# EAGLE board Amplifier_v1.1 (EAGLE 6.5.0)

Size 100 x 80 mm. Coordinates in mm from the lower left corner, seen from the top.
Outline: 0,0 100,0 100,80 0,80 0,0
Copper layers (1*16): Top 0.035mm / dielectric 1.5mm / Bottom 0.035mm
Design rules "default": minimum track width 10mil, minimum drill 24mil, track to track 8mil, track to pad 8mil, pad to pad 8mil, via to via 8mil, smd to smd 8mil, copper to edge 40mil, drill to drill 8mil, minimum pad ring 10mil, minimum via ring 8mil, stop-mask expansion 4mil, vias tented up to drill 0mil, thermal gap 10mil

## Footprints (pad centres in the part's own frame; a part is rotated, then mirrored left to right if it is on the bottom)
SMT_PAD_3MM = smd 3 x 3: PAD 0,0
C025-024X044 = drill 0.813 octagon: 1 -1.27,0; 2 1.27,0
E2,5-6 = drill 0.813 pad 1.6: + -1.27,0 | drill 0.813 pad 1.6 octagon: - 1.27,0
DIL08 = drill 0.813 pad 1.27: 1 -3.81,-3.81; 2 -1.27,-3.81; 3 1.27,-3.81; 4 3.81,-3.81; 5 3.81,3.81; 6 1.27,3.81; 7 -1.27,3.81; 8 -3.81,3.81
DPACK = smd 1.6 x 3: 1 -2.28,-4.8; 3 2.28,-4.8 | smd 5.8 x 6.2: 4 0,2.38
LM337 = smd 1.6 x 3: 1 -2.28,-4.8; 3 2.28,-4.8 | smd 5.8 x 6.2: 4 0,2.38
SMT_PAD_5MM = smd 5 x 5: PAD 0,0
0204V = drill 0.813 octagon: 1 -1.27,0; 2 1.27,0
B25U = drill 0.813 long: A 2.54,-0.889; E -2.54,-0.889; S 0,-0.889
NDN0015A = drill 0.7 pad 1.25: 1 0,0; 2 0.965,2.54; 3 1.93,0; 4 2.895,2.54; 5 3.86,0; 6 4.825,2.54; 7 5.79,0; 8 6.755,2.54; 9 7.72,0; 10 8.685,2.54; 11 9.65,0; 12 11.58,2.54; 13 13.51,0; 14 15.44,2.54; 15 17.37,0
TONE_POT_2GANG = drill 1: 1_1 -6,-3; 1_2 -2,-3; 1_3 2,-3; 2_1 -4,-3; 2_2 0,-3; 2_3 4,-3 | hole 1: 6,-3 | hole 3.3: -7.15,0.3; 7.15,0.3
INDUCTOR = drill 0.7 long: 1 -2.5,0; 2 2.5,0
VOL_POT_2GANG = drill 1.3: 1_1 -5,-2; 1_2 0,-2; 1_3 5,-2; 2_1 -5,3; 2_2 0,3; 2_3 5,3

## Placement (x,y rotation side)
B_R_B  SMT_PAD_3MM  [SMT_PAD_3MM]  -101.6,-72.39 0 top  (outside the outline)
B_R_C  SMT_PAD_3MM  [SMT_PAD_3MM]  -101.6,-77.47 0 top  (outside the outline)
B_R_E  SMT_PAD_3MM  [SMT_PAD_3MM]  -101.6,-67.31 0 top  (outside the outline)
C1  [C025-024X044]  -25.4,93.98 0 top  (outside the outline)
C2  100uF  [E2,5-6]  -91.44,-10.16 0 top  (outside the outline)
C3  [C025-024X044]  -30.48,93.98 0 top  (outside the outline)
C4  [C025-024X044]  -35.56,93.98 0 top  (outside the outline)
C5  [C025-024X044]  -40.64,93.98 0 top  (outside the outline)
C6  [C025-024X044]  -45.72,93.98 0 top  (outside the outline)
C7  [C025-024X044]  -50.8,93.98 0 top  (outside the outline)
C8  [C025-024X044]  -55.88,93.98 0 top  (outside the outline)
C9  [C025-024X044]  -60.96,93.98 0 top  (outside the outline)
C10  [C025-024X044]  -106.68,-402.59 0 top  (outside the outline)
C11  [C025-024X044]  -101.6,-402.59 0 top  (outside the outline)
C12  [C025-024X044]  -96.52,-402.59 0 top  (outside the outline)
C13  [C025-024X044]  -91.44,-402.59 0 top  (outside the outline)
C14  [C025-024X044]  -86.36,-402.59 0 top  (outside the outline)
C15  [C025-024X044]  -81.28,-402.59 0 top  (outside the outline)
C16  100uF  [E2,5-6]  -91.44,-16.51 0 top  (outside the outline)
C17  0.1uF  [C025-024X044]  -92.71,-22.86 0 top  (outside the outline)
C18  0.1uF  [C025-024X044]  -92.71,-27.94 0 top  (outside the outline)
C19  22pF  [C025-024X044]  -92.71,-34.29 0 top  (outside the outline)
C20  22pF  [C025-024X044]  -101.6,-40.64 0 top  (outside the outline)
C21  22pF  [C025-024X044]  -101.6,-57.15 0 top  (outside the outline)
C22  100uF  [E2,5-6]  -100.33,-140.97 0 top  (outside the outline)
C23  100uF  [E2,5-6]  -100.33,-148.59 0 top  (outside the outline)
C24  0.1uF  [C025-024X044]  -101.6,-154.94 0 top  (outside the outline)
C25  0.1uF  [C025-024X044]  -101.6,-161.29 0 top  (outside the outline)
C26  0.1uF  [C025-024X044]  -101.6,-172.72 0 top  (outside the outline)
C27  100uF  [E2,5-6]  -100.33,-180.34 0 top  (outside the outline)
C29  0.1uF  [C025-024X044]  -106.68,-440.69 0 top  (outside the outline)
C31  0.1uF  [C025-024X044]  -106.68,-454.66 0 top  (outside the outline)
C33  0.1uF  [C025-024X044]  -106.68,-476.25 0 top  (outside the outline)
C35  0.1uF  [C025-024X044]  -100.33,-476.25 0 top  (outside the outline)
C37  0.1uF  [C025-024X044]  -106.68,-497.84 0 top  (outside the outline)
C39  0.1uF  [C025-024X044]  -100.33,-497.84 0 top  (outside the outline)
C41  0.1uF  [C025-024X044]  -106.68,-519.43 0 top  (outside the outline)
C43  0.1uF  [C025-024X044]  -100.33,-519.43 0 top  (outside the outline)
C45  0.1uF  [C025-024X044]  -106.68,-541.02 0 top  (outside the outline)
C47  0.1uF  [C025-024X044]  -100.33,-541.02 0 top  (outside the outline)
C49  0.1uF  [C025-024X044]  -106.68,-562.61 0 top  (outside the outline)
C51  0.1uF  [C025-024X044]  -100.33,-562.61 0 top  (outside the outline)
C53  0.1uF  [C025-024X044]  -106.68,-584.2 0 top  (outside the outline)
C55  0.1uF  [C025-024X044]  -100.33,-584.2 0 top  (outside the outline)
IC1  NE5532N  [DIL08]  -101.6,-222.25 0 top  (outside the outline)
IC2  NE5532N  [DIL08]  -101.6,-232.41 0 top  (outside the outline)
IC3  NE5532N  [DIL08]  -101.6,-303.53 0 top  (outside the outline)
IC4  NE5532N  [DIL08]  -101.6,-360.68 0 top  (outside the outline)
IC5  NE5532N  [DIL08]  -88.9,-360.68 0 top  (outside the outline)
IC6  NE5532N  [DIL08]  -76.2,-360.68 0 top  (outside the outline)
IC7  NE5532N  [DIL08]  -101.6,-283.21 0 top  (outside the outline)
IC8  LM317MABDTRK  [DPACK]  -115.57,-580.39 0 top  (outside the outline)
IC9  LM337  [LM337]  -127,-580.39 0 top  (outside the outline)
N_B  SMT_PAD_5MM  [SMT_PAD_5MM]  -100.33,-111.76 0 top  (outside the outline)
N_D  SMT_PAD_5MM  [SMT_PAD_5MM]  -100.33,-124.46 0 top  (outside the outline)
N_S  SMT_PAD_5MM  [SMT_PAD_5MM]  -100.33,-118.11 0 top  (outside the outline)
P_B  SMT_PAD_5MM  [SMT_PAD_5MM]  -100.33,-92.71 0 top  (outside the outline)
P_D  SMT_PAD_5MM  [SMT_PAD_5MM]  -100.33,-99.06 0 top  (outside the outline)
P_S  SMT_PAD_5MM  [SMT_PAD_5MM]  -100.33,-105.41 0 top  (outside the outline)
R1  [0204V]  -44.45,62.23 0 top  (outside the outline)
R2  [0204V]  -54.61,62.23 0 top  (outside the outline)
R3  [0204V]  -104.14,-292.1 0 top  (outside the outline)
R4  [0204V]  -104.14,-297.18 0 top  (outside the outline)
R5  [0204V]  -104.14,-331.47 0 top  (outside the outline)
R6  [0204V]  -85.09,62.23 0 top  (outside the outline)
R7  [0204V]  -17.78,73.66 0 top  (outside the outline)
R8  [0204V]  -27.94,73.66 0 top  (outside the outline)
R9  [0204V]  -38.1,73.66 0 top  (outside the outline)
R10  [0204V]  -48.26,73.66 0 top  (outside the outline)
R11  [0204V]  -58.42,73.66 0 top  (outside the outline)
R12  [0204V]  -68.58,73.66 0 top  (outside the outline)
R13  [0204V]  -78.74,73.66 0 top  (outside the outline)
R14  [0204V]  -88.9,73.66 0 top  (outside the outline)
R15  [0204V]  -17.78,78.74 0 top  (outside the outline)
R16  [0204V]  -93.98,-321.31 0 top  (outside the outline)
R17  [0204V]  -104.14,-326.39 0 top  (outside the outline)
R18  [0204V]  -93.98,-326.39 0 top  (outside the outline)
R19  [0204V]  -86.36,-378.46 0 top  (outside the outline)
R20  [0204V]  -76.2,-378.46 0 top  (outside the outline)
R21  [0204V]  -66.04,-378.46 0 top  (outside the outline)
R22  [0204V]  -104.14,-387.35 0 top  (outside the outline)
R23  [0204V]  -93.98,-387.35 0 top  (outside the outline)
R24  [0204V]  -83.82,-387.35 0 top  (outside the outline)
R25  [0204V]  -73.66,-387.35 0 top  (outside the outline)
R26  [0204V]  -63.5,-387.35 0 top  (outside the outline)
R27  [0204V]  -104.14,-392.43 0 top  (outside the outline)
R28  [0204V]  -93.98,-392.43 0 top  (outside the outline)
R29  [0204V]  -83.82,-392.43 0 top  (outside the outline)
R30  [0204V]  -73.66,-392.43 0 top  (outside the outline)
R31  [0204V]  -63.5,-392.43 0 top  (outside the outline)
R32  [0204V]  -104.14,-397.51 0 top  (outside the outline)
R33  [0204V]  -93.98,-397.51 0 top  (outside the outline)
R34  [0204V]  -48.26,88.9 0 top  (outside the outline)
R35  [0204V]  -58.42,88.9 0 top  (outside the outline)
R36  [0204V]  -83.82,-397.51 0 top  (outside the outline)
R37  [0204V]  -73.66,-397.51 0 top  (outside the outline)
R38  [0204V]  -63.5,-397.51 0 top  (outside the outline)
R43  [B25U]  -100.33,-31.75 0 top  (outside the outline)
R44  1.2k  [0204V]  -99.06,-46.99 0 top  (outside the outline)
R45  500  [0204V]  -99.06,-52.07 0 top  (outside the outline)
R46  12k  [0204V]  -99.06,-63.5 0 top  (outside the outline)
R47  1.2k  [0204V]  -99.06,-82.55 0 top  (outside the outline)
R48  1.2k  [0204V]  -99.06,-87.63 0 top  (outside the outline)
R49  0.1  [0204V]  -99.06,-130.81 0 top  (outside the outline)
R50  0.1  [0204V]  -99.06,-135.89 0 top  (outside the outline)
R51  10  [0204V]  -99.06,-167.64 0 top  (outside the outline)
R52  1.2k  [0204V]  -99.06,-186.69 0 top  (outside the outline)
U8  LME49830  [NDN0015A]  -93.98,-5.08 0 top  (outside the outline)
U$1  TONE_POT_2GANG  [TONE_POT_2GANG]  -99.06,-407.67 0 top  (outside the outline)
U$2  INDUCTOR  [INDUCTOR]  -20.32,54.61 0 top  (outside the outline)
U$3  INDUCTOR  [INDUCTOR]  -34.29,54.61 0 top  (outside the outline)
U$4  INDUCTOR  [INDUCTOR]  -48.26,54.61 0 top  (outside the outline)
U$5  INDUCTOR  [INDUCTOR]  -62.23,54.61 0 top  (outside the outline)
U$6  INDUCTOR  [INDUCTOR]  -76.2,54.61 0 top  (outside the outline)
U$7  INDUCTOR  [INDUCTOR]  -90.17,54.61 0 top  (outside the outline)
U$8  INDUCTOR  [INDUCTOR]  -88.9,-350.52 0 top  (outside the outline)
U$9  INDUCTOR  [INDUCTOR]  -74.93,-350.52 0 top  (outside the outline)
U$10  INDUCTOR  [INDUCTOR]  -104.14,-339.09 0 top  (outside the outline)
U$11  INDUCTOR  [INDUCTOR]  -88.9,-339.09 0 top  (outside the outline)
U$12  INDUCTOR  [INDUCTOR]  -73.66,-339.09 0 top  (outside the outline)
U$13  TONE_POT_2GANG  [TONE_POT_2GANG]  -99.06,-416.56 0 top  (outside the outline)
U$14  TONE_POT_2GANG  [TONE_POT_2GANG]  -99.06,-425.45 0 top  (outside the outline)
U$15  INDUCTOR  [INDUCTOR]  -104.14,-350.52 0 top  (outside the outline)
U$16  VOL_POT_2GANG  [VOL_POT_2GANG]  -96.52,-212.09 0 top  (outside the outline)

## Library data of the parts
B_R_B B_R_C B_R_E IC9 N_B N_D N_S P_B P_D P_S U$1-U$16 = Amplifier_Parts
C1-C27 C29 C31 C33 C35 C37 C39 C41 C43 C45 C47 C49 C51 C53 C55 R1-R38 R44-R52 = rcl
IC1-IC7 = linear
IC8 = v-reg
R43 = pot
U8 = texas

## Nets
GND: C2.+ C3.1 C4.1 C7.2 C8.2 C10.1 C11.1 C14.2 C15.2 C16.- C17.1 C18.2 C22.- C23.+ C24.2 C25.1 C26.1 C27.- C29.1 C31.2 C33.1 C35.2 C37.1 C39.2 C41.1 C43.2 C45.1 C47.2 C49.1 C51.2 C53.1 C55.2 IC1.5 IC2.5 IC3.5 IC4.5 IC5.5 IC6.5 IC7.3 IC7.5 R3.2 R5.1 R7.1 R10.1 R13.1 R15.1 R20.1 R23.1 R26.1 R28.1 R31.2 R38.1 U8.3 U$3.1 U$4.1 U$5.1 U$6.1 U$9.1 U$10.1 U$11.1 U$12.1
N$1: IC7.2 R2.2 U$16.1_1
N$2: C1.1 IC7.1 U$16.1_2 U$16.1_3
N$3: IC7.6 R1.2 U$16.2_1
N$5: C9.1 IC7.7 U$16.2_2 U$16.2_3
N$6: IC1.2 R7.2 R8.1
N$7: C4.2 R4.2 U$2.2
N$9: IC2.2 R12.1 R13.2
N$11: IC1.6 R6.2 R34.1
N$12: C3.2 IC1.3 R3.1 U$2.1
N$13: C5.2 R9.2 U$3.2
N$14: C5.1 IC2.3 R10.2 U$4.2
N$15: IC3.1 R16.1 R17.2
N$17: IC2.1 R11.1 R12.2
N$18: IC2.6 R11.2 R35.1
N$19: IC3.6 R16.2 R18.1
N$21: IC3.7 U$14.1_2 U$14.1_3
N$22: C6.2 C8.1 R14.2 U$5.2
N$23: C7.1 IC3.3 R15.2 U$6.2 U$7.2
N$24: R18.2 U$14.1_1
N$25: C11.2 R32.2 U$8.2
N$27: IC3.2 R5.2 R17.1
N$29: C6.1 U$7.1
N$30: IC4.6 R19.2 R29.1
N$32: C12.2 R22.2 U$9.2
N$33: C12.1 IC5.3 R23.2 U$10.2
N$34: IC5.1 R24.1 R25.2
N$35: IC5.6 R24.2 R30.1
N$37: C13.2 C15.1 R27.2 U$11.2
N$38: C14.1 IC6.3 R28.2 U$12.2 U$15.2
N$41: C13.1 U$15.1
N$42: R29.2 U$1.2_1
N$43: IC4.7 U$1.2_2 U$1.2_3
N$44: IC5.7 U$13.2_2 U$13.2_3
N$45: R30.2 U$13.2_1
N$46: IC4.1 R19.1 R21.2
N$47: C10.2 IC4.3 R31.1 U$8.1
N$49: IC4.2 R20.2 R21.1
N$50: IC5.2 R25.1 R26.2
N$53: R34.2 U$1.1_1
N$54: IC1.7 U$1.1_2 U$1.1_3
N$55: IC2.7 U$13.1_2 U$13.1_3
N$56: R35.2 U$13.1_1
N$57: IC6.1 R33.1 R36.2
N$58: IC6.6 R33.2 R37.1
N$59: IC6.7 U$14.2_2 U$14.2_3
N$60: R37.2 U$14.2_1
N$61: IC6.2 R36.1 R38.2
N$63: C1.2 R4.1 R9.1 R14.1
N$64: C9.2 R22.1 R27.1 R32.1
N$65: B_R_C.PAD C20.2 R43.E R44.1
N$66: C21.2 U8.6
N$67: B_R_E.PAD C19.1 C21.1 R45.1 U8.11
N$68: B_R_B.PAD C20.1 R43.A R45.2
N$69: C19.2 R44.2 U8.12
N$70: R47.2 U8.13
N$71: R48.2 U8.8
N$72: P_B.PAD R46.2 R48.1
N$73: N_B.PAD R46.1 R47.1
N$74: P_S.PAD R49.2
N$75: N_S.PAD R49.1 R50.1 R50.2 R51.2
N$80: C2.- C17.2 U8.10
N$82: C16.+ C18.1 U8.15
N$84: C26.2 R51.1
N$85: C27.+ R52.2 U8.2
N$88: IC1.1 R6.1 R8.2
VCC: C22.+ C24.1 C31.1 C35.1 C39.1 C43.1 C47.1 C51.1 C55.1 IC1.8 IC2.8 IC3.8 IC4.8 IC5.8 IC6.8 IC7.8 P_D.PAD
VEE: C23.- C25.2 C29.2 C33.2 C37.2 C41.2 C45.2 C49.2 C53.2 IC1.4 IC2.4 IC3.4 IC4.4 IC5.4 IC6.4 IC7.4 N_D.PAD

## Tracks (layer width: path | path; a pad name or v marks a point on that pad's centre or on a via)
GND  (60 unrouted)
N$1  (2 unrouted)
N$2  (3 unrouted)
N$3  (2 unrouted)
N$5  (3 unrouted)
N$6  (2 unrouted)
N$7  (2 unrouted)
N$9  (2 unrouted)
N$11  (2 unrouted)
N$12  (3 unrouted)
N$13  (2 unrouted)
N$14  (3 unrouted)
N$15  (2 unrouted)
N$17  (2 unrouted)
N$18  (2 unrouted)
N$19  (2 unrouted)
N$21  (2 unrouted)
N$22  (3 unrouted)
N$23  (4 unrouted)
N$24  (1 unrouted)
N$25  (2 unrouted)
N$27  (2 unrouted)
N$29  (1 unrouted)
N$30  (2 unrouted)
N$32  (2 unrouted)
N$33  (3 unrouted)
N$34  (2 unrouted)
N$35  (2 unrouted)
N$37  (3 unrouted)
N$38  (4 unrouted)
N$41  (1 unrouted)
N$42  (1 unrouted)
N$43  (2 unrouted)
N$44  (2 unrouted)
N$45  (1 unrouted)
N$46  (2 unrouted)
N$47  (3 unrouted)
N$49  (2 unrouted)
N$50  (2 unrouted)
N$53  (1 unrouted)
N$54  (2 unrouted)
N$55  (2 unrouted)
N$56  (1 unrouted)
N$57  (2 unrouted)
N$58  (2 unrouted)
N$59  (2 unrouted)
N$60  (1 unrouted)
N$61  (2 unrouted)
N$63  (3 unrouted)
N$64  (3 unrouted)
N$65  (3 unrouted)
N$66  (1 unrouted)
N$67  (4 unrouted)
N$68  (3 unrouted)
N$69  (2 unrouted)
N$70  (1 unrouted)
N$71  (1 unrouted)
N$72  (2 unrouted)
N$73  (2 unrouted)
N$74  (1 unrouted)
N$75  (4 unrouted)
N$80  (2 unrouted)
N$82  (2 unrouted)
N$84  (1 unrouted)
N$85  (2 unrouted)
N$88  (2 unrouted)
VCC  (16 unrouted)
VEE  (16 unrouted)